# Altium PCB RBR-RAMON2.PcbDoc
Units mil, origin at the board's own origin, x right, y up, seen from the top; angles counter-clockwise.
Board outline 10025.24 x 9586.2 mil, 2 copper layers (Top Layer, Bottom Layer); 14 components, 43 nets, 163 pads, 44 vias.
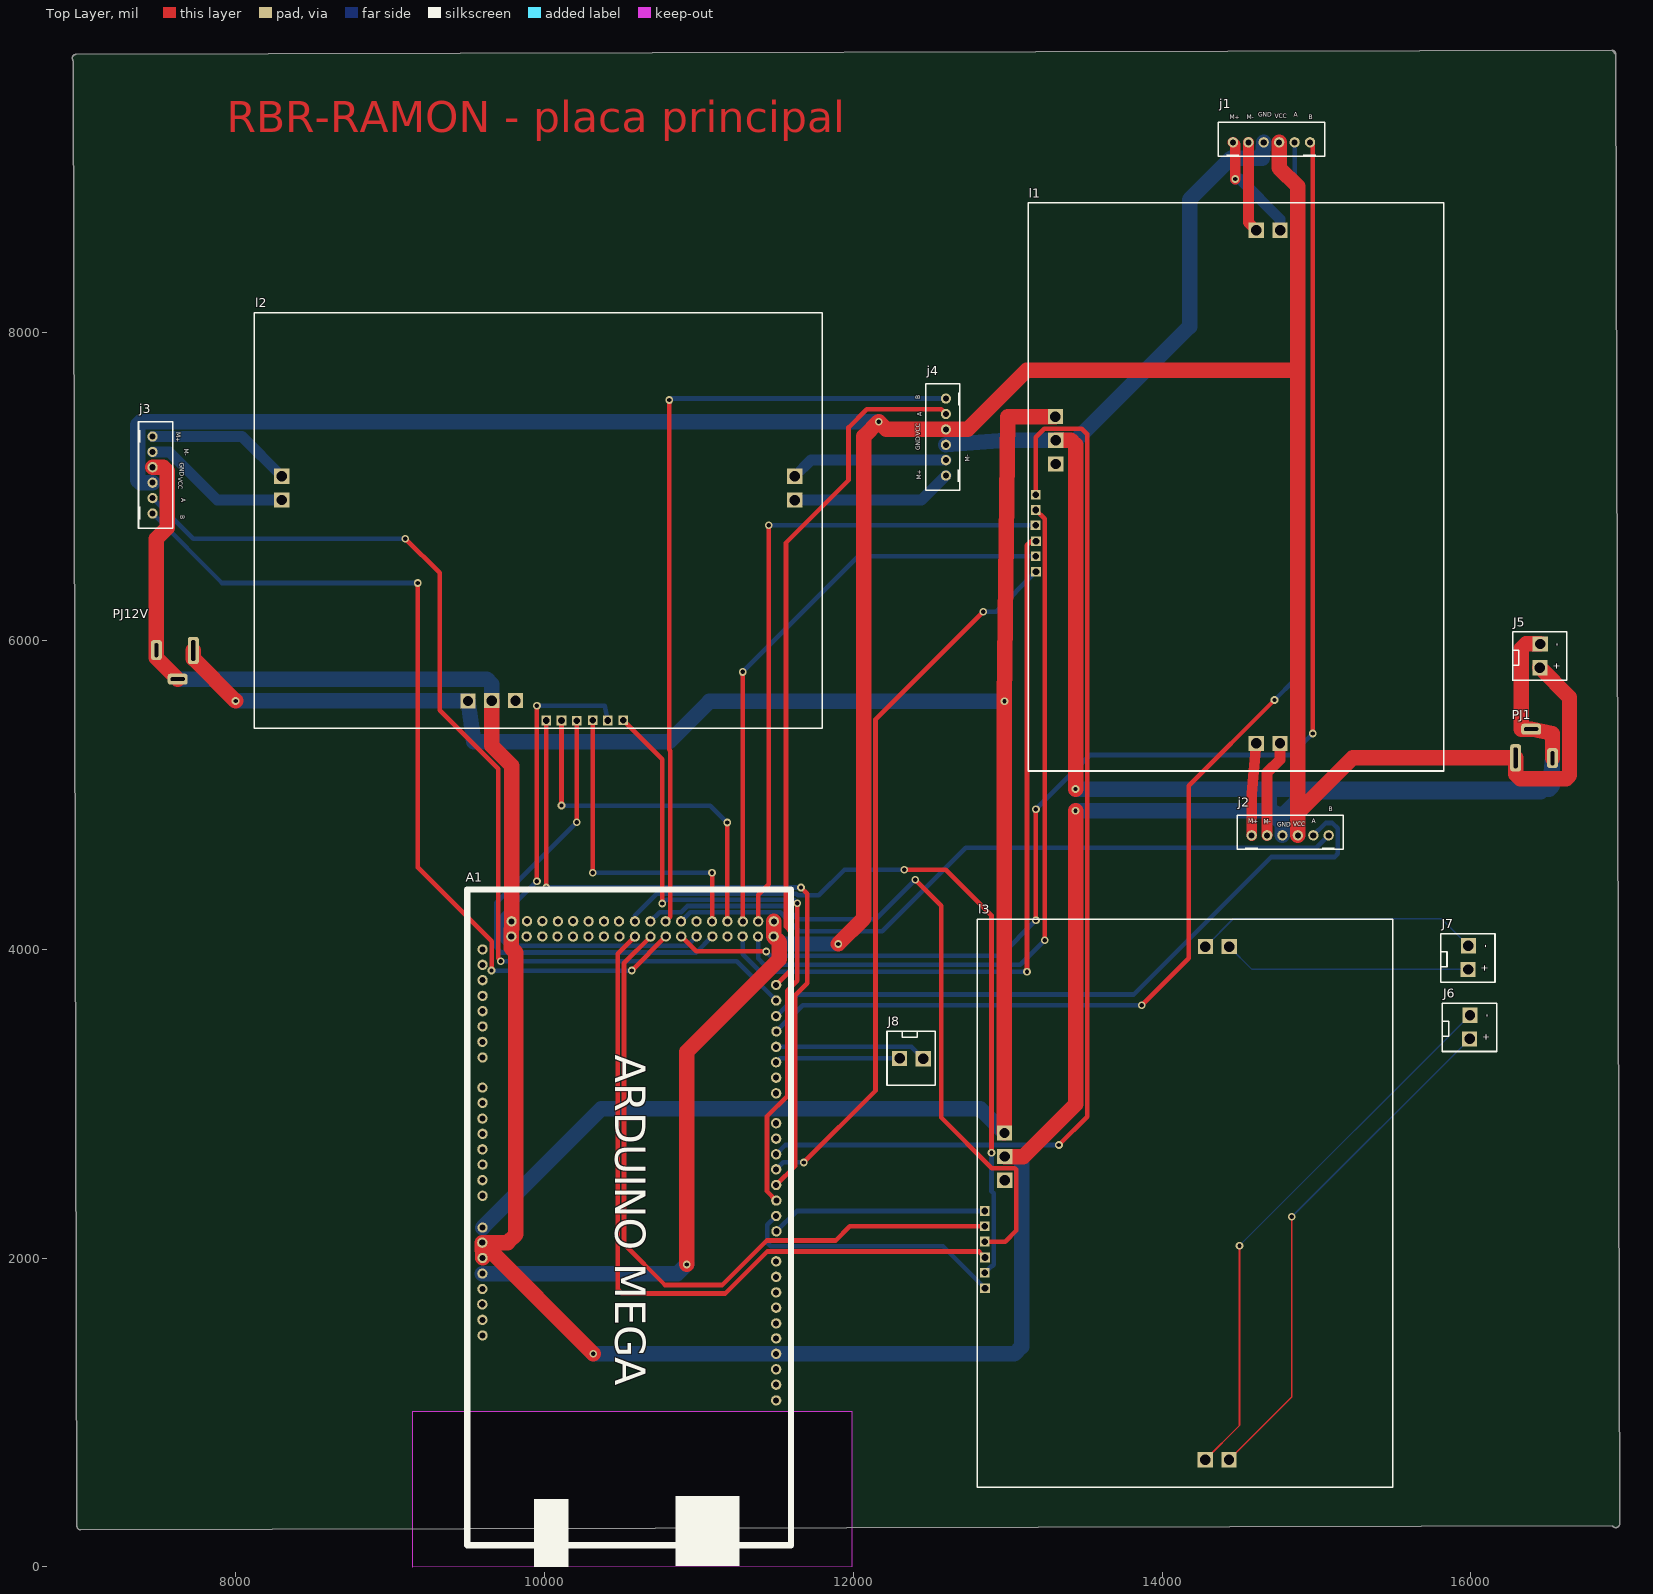
[diagram p0: Top Layer view]
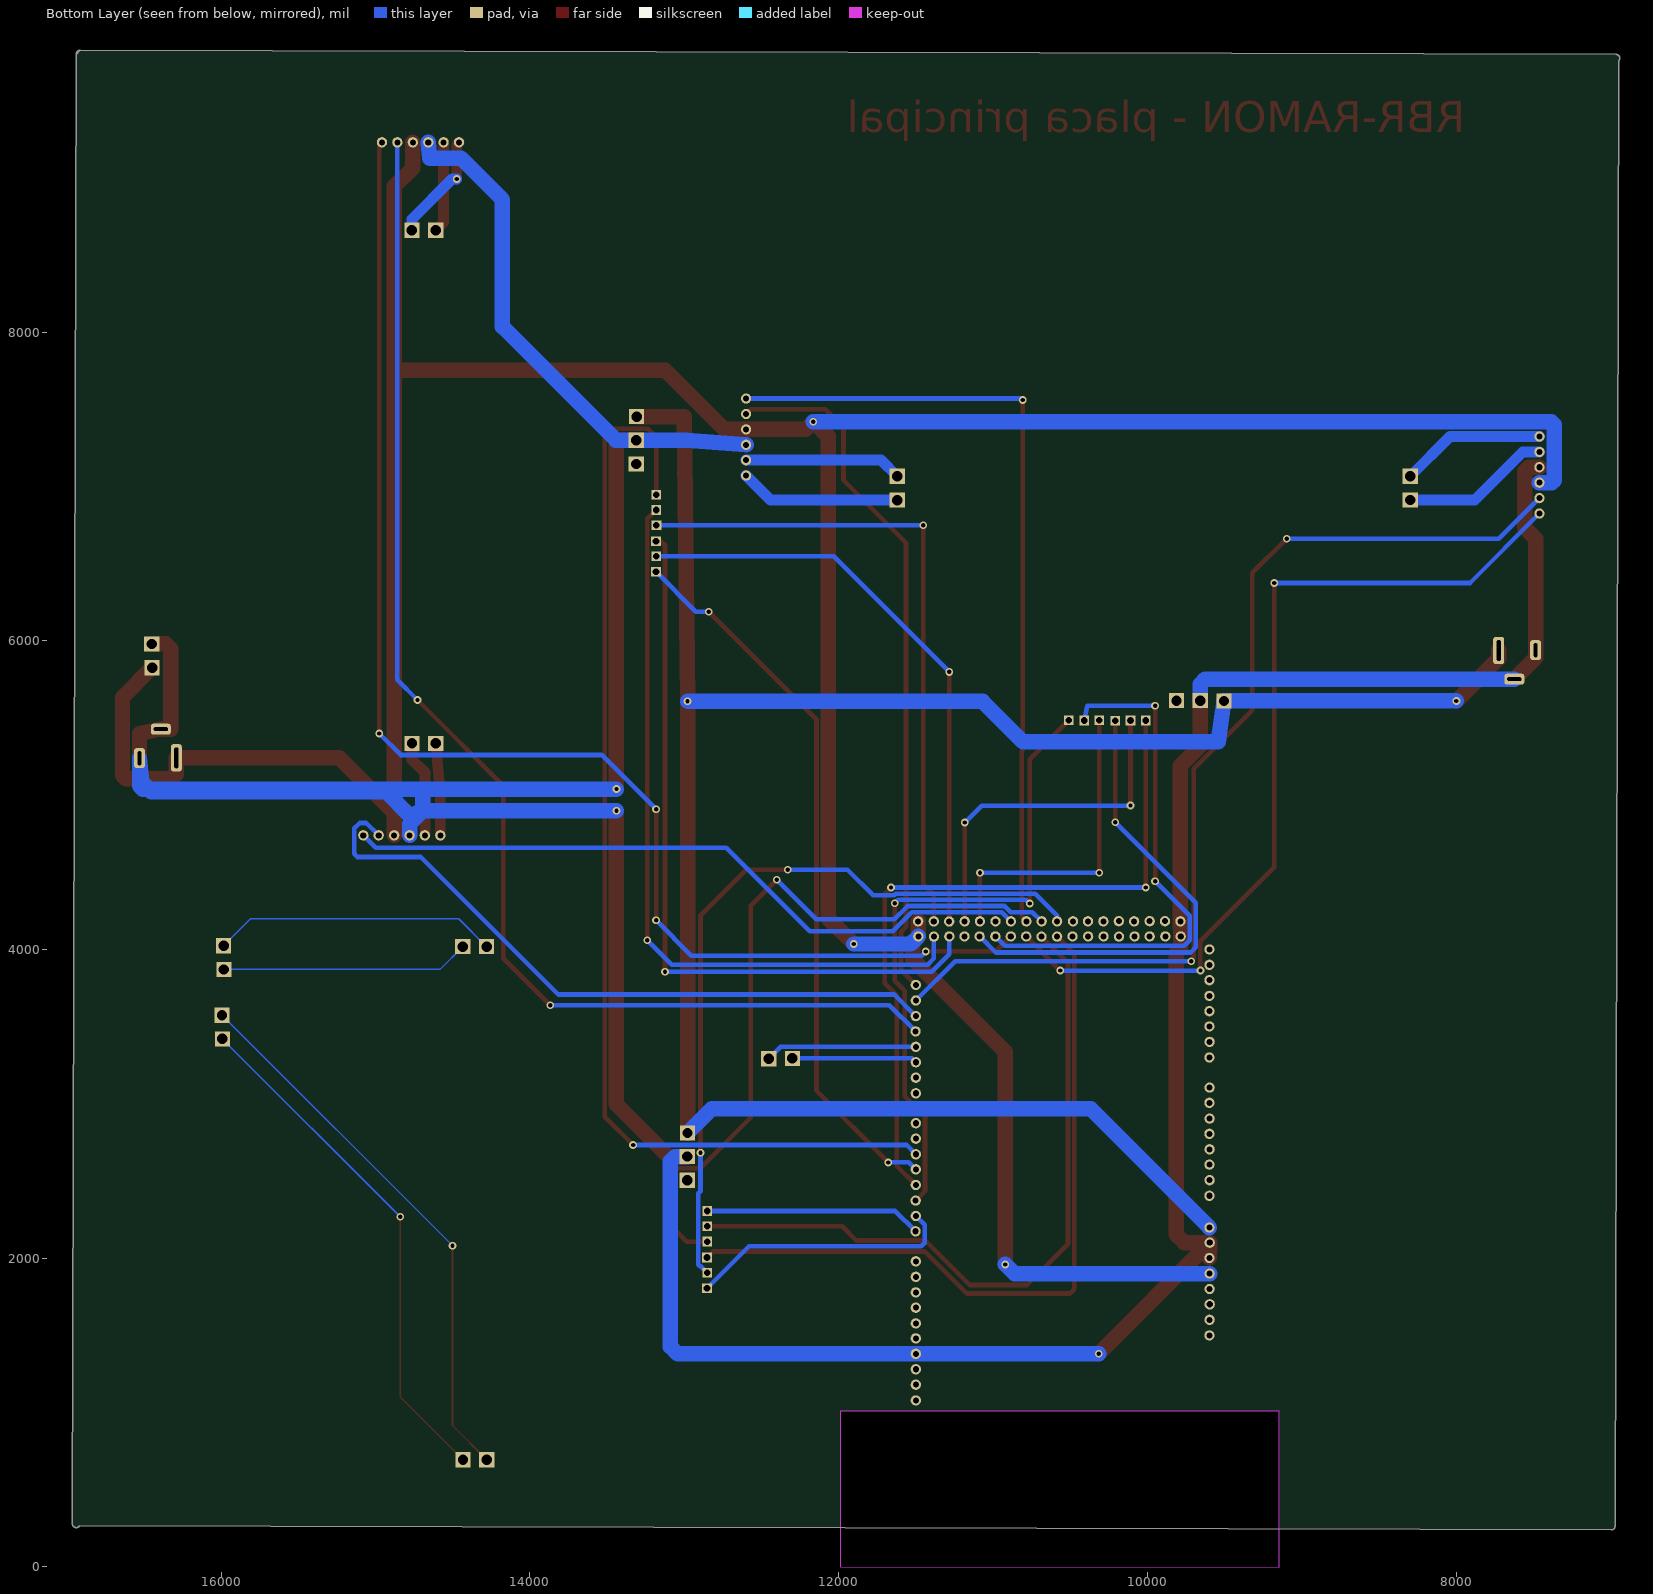
[diagram p1: Bottom Layer view, seen from below]
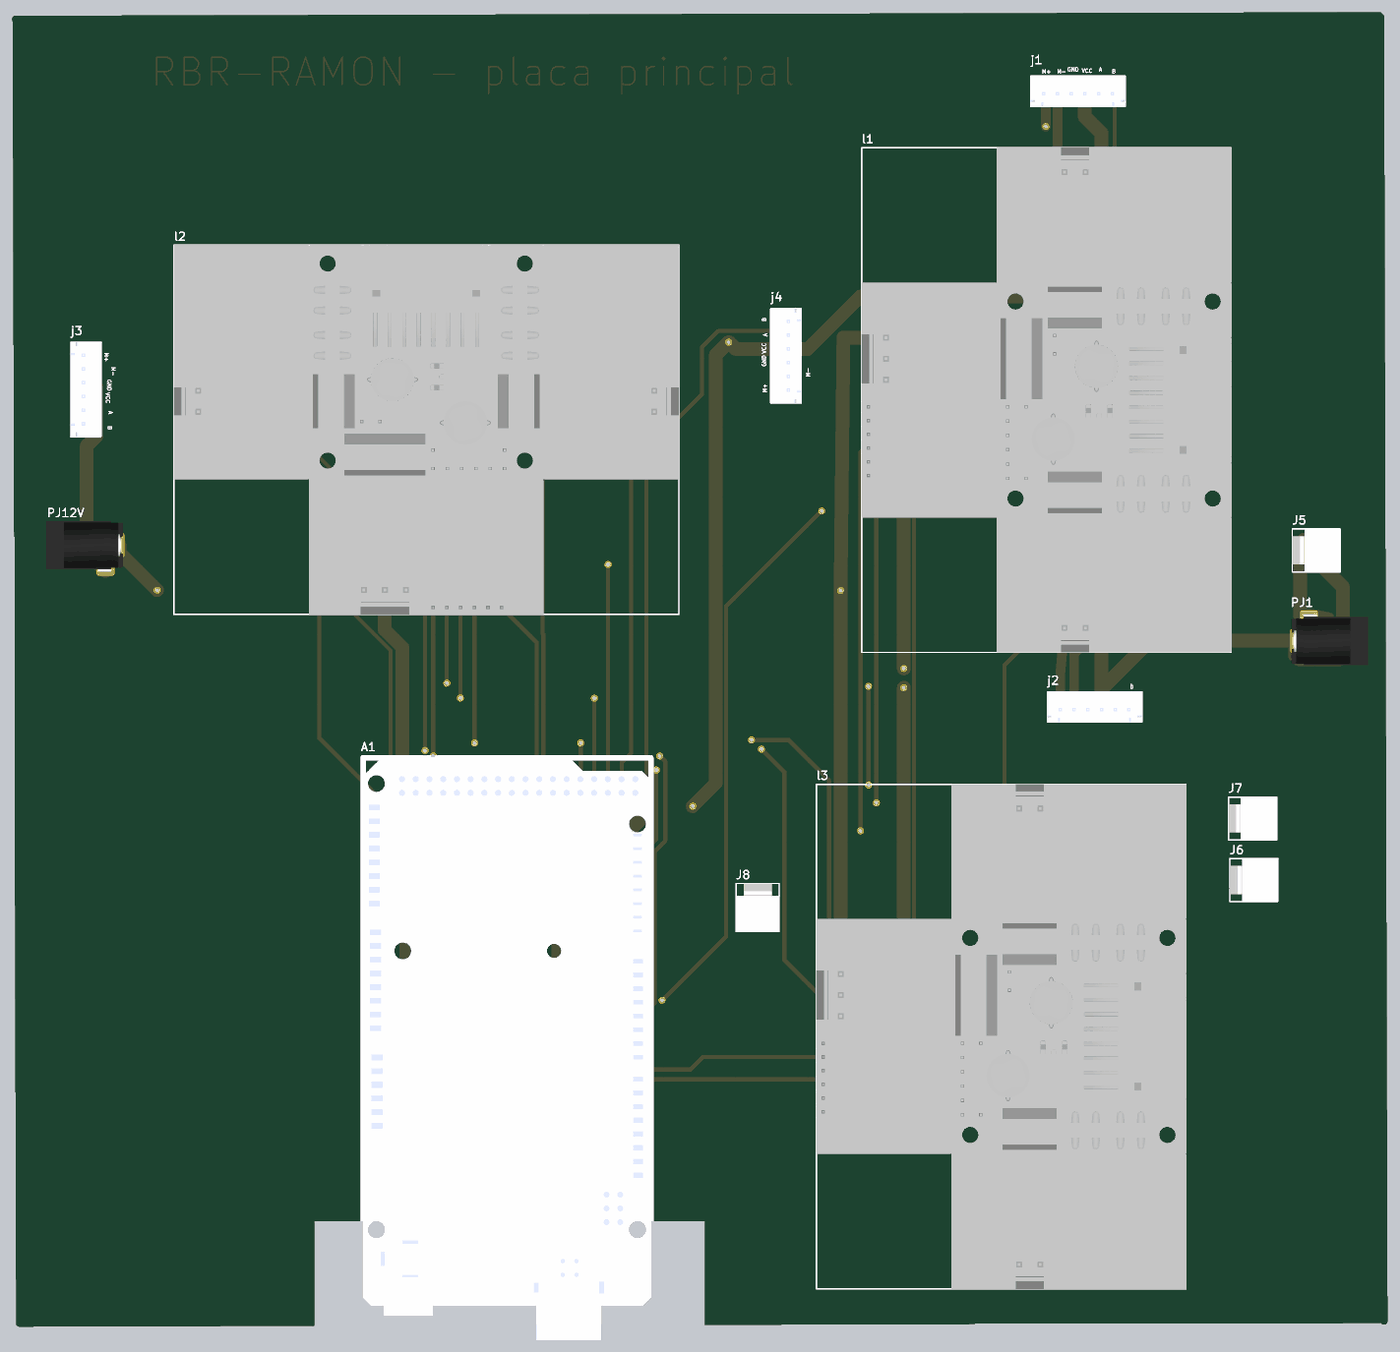
[diagram p2: 3D render of the assembled board from above, using the file's embedded part models]

## Layer stack, top to bottom
Top Solder: solder mask 0.4, Solder Resist, Dk 3.5
Top Layer: signal copper 1.4
Dielectric 1: dielectric 12.6, FR-4, Dk 4.8
Bottom Layer: signal copper 1.4
Bottom Solder: solder mask 0.4, Solder Resist, Dk 3.5

## Board outline
6969.99,269.93 6945.02,9759.94 cw(c6965,9775) 6964.93,9800.01 16915.09,9826.19 cw(c16915.18,9801.17) 16940.19,9801.24 16940.19,9801.21 ccw(c16915.18,9801.17) 16915.11,9826.19 16940.19,9801.21 16965.24,280.17 16965.24,280.11 cw(c16940.22,280.11) 16919.5,266.09 6995.07,239.99 cw(c6995,265)
cut-out: 9145,-2.61 9145,1010 11990,1010 11990,2.37

## Design rules (kind name [scope] priority, off if disabled: settings)
Clearance [All] p1: gap=10 ignorepadtopadclearanceinfootprint=FALSE
Height [All] p1: minheight=0 maxheight=30000 prefheight=500
HoleSize [All] p1: absolutevalues=TRUE maxlimit=250 minlimit=1 maxpercent=80.000 minpercent=20.000
MinimumSolderMaskSliver [All] p1: minsoldermaskwidth=4
PolygonConnect [All] p1: connectstyle=Relief reliefconductorwidth=10 reliefentries=4 polygonreliefangle="90 Angle" airgapwidth=10
RoutingVias [All] p1: holewidth=28 width=50 viastyle="Through Hole" minholewidth=28 minwidth=50 maxholewidth=28 maxwidth=50
SolderMaskExpansion [All] p1: expansion=0 istentingtop=FALSE
SupplyNets "Schematic Supply Nets_2" [InNet('+12')] p1: voltage=0.000
SupplyNets "Schematic Supply Nets_1" [InNet('+5')] p2: voltage=0.000
SupplyNets "Schematic Supply Nets" [InNet('GND')] p3: voltage=0.000
Width SEÑAL [InNet('NetA1_2')] p1: maxlimit=30 minlimit=30 preferedwidth=30
Width SEÑAL_1 [InNet('NetA1_3')] p2: maxlimit=30 minlimit=30 preferedwidth=30
Width SEÑAL_2 [InNet('NetA1_4')] p3: maxlimit=30 minlimit=30 preferedwidth=30
Width SEÑAL_3 [InNet('NetA1_5')] p4: maxlimit=30 minlimit=30 preferedwidth=30
Width SEÑAL_4 [InNet('NetA1_6')] p5: maxlimit=30 minlimit=30 preferedwidth=30
Width SEÑAL_5 [InNet('NetA1_7')] p6: maxlimit=30 minlimit=30 preferedwidth=30
Width SEÑAL_6 [InNet('NetA1_16-TX2')] p7: maxlimit=30 minlimit=30 preferedwidth=30
Width SEÑAL_7 [InNet('NetA1_17-RX2')] p8: maxlimit=30 minlimit=30 preferedwidth=30
Width SEÑAL_8 [InNet('NetA1_18-TX1')] p9: maxlimit=30 minlimit=30 preferedwidth=30
Width SEÑAL_9 [InNet('NetA1_19-RX1')] p10: maxlimit=30 minlimit=30 preferedwidth=30
Width SEÑAL_10 [InNet('NetA1_20-SDA')] p11: maxlimit=30 minlimit=30 preferedwidth=30
Width SEÑAL_11 [InNet('NetA1_21-SCL')] p12: maxlimit=30 minlimit=30 preferedwidth=30
Width SEÑAL_12 [InNet('NetA1_22')] p13: maxlimit=30 minlimit=30 preferedwidth=30
Width SEÑAL_13 [InNet('NetA1_23')] p14: maxlimit=30 minlimit=30 preferedwidth=30
Width SEÑAL_14 [InNet('NetA1_24')] p15: maxlimit=30 minlimit=30 preferedwidth=30
Width SEÑAL_20 [InNet('NetA1_25')] p16: maxlimit=30 minlimit=30 preferedwidth=30
Width SEÑAL_19 [InNet('NetA1_27')] p17: maxlimit=30 minlimit=30 preferedwidth=30
Width SEÑAL_18 [InNet('NetA1_28')] p18: maxlimit=30 minlimit=30 preferedwidth=30
Width SEÑAL_17 [InNet('NetA1_29')] p19: maxlimit=30 minlimit=30 preferedwidth=30
Width SEÑAL_16 [InNet('NetA1_30')] p20: maxlimit=30 minlimit=30 preferedwidth=30
Width SEÑAL_15 [InNet('NetA1_32')] p21: maxlimit=30 minlimit=30 preferedwidth=30
Width SEÑAL_21 [InNet('NetA1_33')] p22: maxlimit=30 minlimit=30 preferedwidth=30
Width SEÑAL_22 [InNet('NetA1_34')] p23: maxlimit=30 minlimit=30 preferedwidth=30
Width SEÑAL_23 [InNet('NetA1_35')] p24: maxlimit=30 minlimit=30 preferedwidth=30
Width SEÑAL_24 [InNet('NetA1_36')] p25: maxlimit=30 minlimit=30 preferedwidth=30
Width SEÑAL_25 [InNet('NetA1_37')] p26: maxlimit=30 minlimit=30 preferedwidth=30
Width SEÑAL_26 [InNet('NetA1_38')] p27: maxlimit=30 minlimit=30 preferedwidth=30
Width SEÑAL_27 [InNet('NetA1_39')] p28: maxlimit=30 minlimit=30 preferedwidth=30
Width M4- [InNet('Netj4_M4-')] p29: maxlimit=70 minlimit=60 preferedwidth=70
Width M4+ [InNet('Netj4_M4+')] p30: maxlimit=70 minlimit=60 preferedwidth=70
Width M3- [InNet('Netj3_M3-')] p31: maxlimit=70 minlimit=60 preferedwidth=70
Width M3+ [InNet('Netj3_M3+')] p32: maxlimit=70 minlimit=60 preferedwidth=70
Width M2- [InNet('Netj2_M2-')] p33: maxlimit=70 minlimit=60 preferedwidth=70
Width M2+ [InNet('Netj2_M2+')] p34: maxlimit=70 minlimit=60 preferedwidth=70
Width M1- [InNet('Netj1_M1-')] p35: maxlimit=70 minlimit=60 preferedwidth=70
Width M1+ [InNet('Netj1_M1+')] p36: maxlimit=70 minlimit=60 preferedwidth=70
Width GND [InNet('GND')] p37: maxlimit=100 minlimit=60 preferedwidth=100
Width "POWER 12V" [InNet('+12')] p38: maxlimit=100 minlimit=60 preferedwidth=100
Width "POWER 5V" [InNet('+5')] p39: maxlimit=100 minlimit=60 preferedwidth=100
27 further rules are at their usual default settings.

## Components (designator, comment, footprint, x,y, rotation, side; value= is the part's Value field where it differs from the comment)
A1 "Arduino Mega" "Arduino Mega" 9500,4167 r270 top
j1 "j1" "CONECTOR JST M1" 14671,9324 r0 top
j2 "j2" "CONECTOR JST M2" 14792,4834.02 r0 top
j3 "j3" "CONECTOR JST M3" 7554.02,7113 r270 top
j4 "j4" "CONECTOR JST M4" 12505.98,7282 r90 top
J5 "Connector_5V" Conector_5V 16408.66,5918.98 r90 top
J6 "Connector_12V" Conector_12V 15953.66,3513.98 r90 top
J7 "Connector_12V" Conector_12V 15943.66,3963.98 r90 top
J8 "Connector_lora_arduino" Conector_lora_arduino 12392.52,3334.37 r0 top
l1 "l298n" L298N_Conectores 14135,7160 r270 top
l2 "l298n" L298N_Conectores 9797,6437 r0 top
l3 "l298n" L298N_Conectores 13805,2519 r270 top
PJ1 "DC Power Jack 5V" "DC Power Jack5V" 16557,5423 r180 top
PJ12V "DC Power Jack 12V" "DC Power Jack12V" 7458,5757 r0 top

## Footprints (in the part's own frame and the unit in brackets; to place one, negate y for a bottom-side part, rotate by r counter-clockwise, add the part's x,y. Pads: shape width x height; smd on the part's side, far side on the other; paste and mask are expansions set on the pad)
"Arduino Mega" [mm]
  round 1.7 hole 1: 0-TX0(32.817,50.8) 1-TX0(35.357,50.8) 2(37.925,50.8) 3(40.411,50.8) 3.3V(60.096,2.464) 4(42.977,50.8) 5(45.542,50.825) 5V(-0.406,50.419) 5V(2.083,50.394) 5V(57.556,2.464) 6(48.082,50.8) 7(50.597,50.851) 8(55.55,50.8) 9(58.09,50.8) 10(60.655,50.8) 11(63.17,50.8) 12(65.761,50.8) 13(68.224,50.8) 14-TX3(27.889,50.8) 15-RX3(25.324,50.8) 16-TX2(22.784,50.8) 17-RX2(20.244,50.8) 18-TX1(17.704,50.851) 19-RX1(15.19,50.8) 20-SDA(12.624,50.8) 21-SCL(10.058,50.8) 22(2.108,47.828) 23(-0.406,47.854) 24(2.083,45.288) 25(-0.381,45.314) 26(2.083,42.799) 27(-0.406,42.774) 28(2.083,40.31) 29(-0.406,40.259) 30(2.083,37.719) 31(-0.406,37.694) 32(2.083,35.179) 33(-0.406,35.154) 34(2.083,32.639) 35(-0.406,32.614) 36(2.108,30.124) 37(-0.406,30.099) 38(2.108,27.559) 39(-0.406,27.559) 40(2.083,25.019) 41(-0.406,24.938) 42(2.083,22.454) 43(-0.406,22.479) 44(2.083,19.914) 45(-0.406,19.939) 46(2.108,17.374) 47(-0.432,17.399) 48(2.083,14.808) 49(-0.406,14.884) 50(2.083,12.319) 51(-0.432,12.319) 52(2.083,9.754) 53(-0.432,9.804) A0(44.755,2.489) A1(42.189,2.464) A2(39.624,2.489) A3(37.109,2.464) A4(34.569,2.489) A5(32.055,2.464) A6(29.464,2.489) A7(26.949,2.464) A8(21.996,2.489) A9(19.431,2.464) A10(16.891,2.489) A11(14.376,2.489) A12(11.862,2.489) A13(9.271,2.489) A14(6.756,2.489) A15(4.216,2.489) AREF(73.304,50.8) GND(-0.406,7.264) GND(2.083,7.214) GND(52.476,2.438) GND(54.991,2.489) GND(70.764,50.8) IOREF(65.176,2.464) N/A(67.742,2.489) RESET(62.611,2.438) SCL(78.435,50.8) SDA(75.844,50.8) VIN(49.987,2.489)
  silkscreen extent -5.66,-0.03 105.84,53.24, body extent -5.72,-0.1 102.24,53.31, height 10.71
"CONECTOR JST M1" [mm]
  round 1.7 hole 1: A1(4.775,-2.388) B1(7.315,-2.388) GND1(-0.305,-2.388) M1+(-5.359,-2.388) M1-(-2.819,-2.388) VCC1(2.235,-2.388)
  silkscreen extent -7.77,-4.7 9.73,0.91, body extent -7.82,-4.73 9.72,1.02, height 2.95
"CONECTOR JST M2" [mm]
  round 1.7 hole 1: A2(4.775,-2.388) B2(7.315,-2.388) GND2(-0.305,-2.388) M2+(-5.359,-2.388) M2-(-2.819,-2.388) VCC2(2.235,-2.388)
  silkscreen extent -7.77,-4.7 9.73,0.91, body extent -7.82,-4.73 9.72,1.02, height 2.95
"CONECTOR JST M3" [mm]
  round 1.7 hole 1: A3(4.775,-2.388) B3(7.315,-2.388) GND3(-0.305,-2.388) M3+(-5.359,-2.388) M3-(-2.819,-2.388) VCC3(2.235,-2.388)
  silkscreen extent -7.77,-4.7 9.73,0.91, body extent -7.82,-4.73 9.72,1.02, height 2.95
"CONECTOR JST M4" [mm]
  round 1.7 hole 1: A4(4.775,-2.388) B4(7.315,-2.388) GND4(-0.305,-2.388) M4+(-5.359,-2.388) M4-(-2.819,-2.388) VCC4(2.235,-2.388)
  silkscreen extent -7.77,-4.7 9.73,0.91, body extent -7.82,-4.73 9.72,1.02, height 2.95
Conector_5V [mm]
  rect 2.5x2.5 hole 1.7: 5V(-2.35,-1) GND(1.55,-1.05)
  silkscreen extent -4.42,-5.42 3.53,3.5, body extent -4.42,-5.48 3.58,3.5, height 11.7
Conector_12V [mm]
  rect 2.5x2.5 hole 1.7: 12V(-2.35,-1) GND(1.55,-1.05)
  silkscreen extent -4.42,-5.42 3.53,3.5, body extent -4.42,-5.48 3.58,3.5, height 11.7
Conector_lora_arduino [mm]
  rect 2.5x2.5 hole 1.7: 16(-2.35,-1) 17(1.55,-1.05)
  silkscreen extent -4.42,-5.42 3.53,3.5, body extent -4.42,-5.48 3.58,3.5, height 11.7
"DC Power Jack5V" [mm]
  rrect50% 1.8x3.3 hole 0.6 slot 2.3 at 90 deg: GND(0.686,4.648)
  rrect50% 3.3x1.8 hole 0.6 slot 2.3 at 0 deg: GND(4.191,-0.127)
  rrect50% 1.8x4.5 hole 0.7 slot 3.4 at 90 deg: VCC(6.756,4.597)
  body extent -6.79,-0.33 7.41,9.12, height 11
"DC Power Jack12V" [mm]
  rrect50% 1.8x3.3 hole 0.6 slot 2.3 at 90 deg: GND(0.686,4.648)
  rrect50% 3.3x1.8 hole 0.6 slot 2.3 at 0 deg: GND(4.191,-0.127)
  rrect50% 1.8x4.5 hole 0.7 slot 3.4 at 90 deg: VCC(6.756,4.597)
  body extent -6.79,-0.33 7.41,9.12, height 11
L298N_Conectores [mm]
  rect 2.5x2.5 hole 1.7: 5V(0.356,-20.93) 12V(-7.442,-20.98) GND(-3.556,-20.93) OUT1(-38.1,16.002) OUT2(-38.1,12.09) OUT3(46.33,12.065) OUT4(46.33,15.977)
  rect 1.6x1.6 hole 1.1: ENA(5.41,-24.206) ENB(18.11,-24.181) IN1(7.925,-24.206) IN2(10.439,-24.232) IN3(13.056,-24.181) IN4(15.545,-24.206)
  silkscreen extent -42.6,-25.45 50.87,42.92, body extent -42.63,-25.48 50.87,43.02, height 26.7

## Part data
j1: library part "CONECTOR JST M1"
j2: library part "CONECTOR JST M2"
j3: library part "CONECTOR JST M3"
j4: library part "CONECTOR JST M4"

## Via types
v1: diameter 50, hole 28, Top Layer to Bottom Layer, 44 vias

## Nets (pads, with @x,y where several pads share a name; then routed paths per layer and width w, separated by ;. In a path a pad name is that pad's centre, name@x,y a point inside that pad or via, vN(x,y) a via of type N, cw(c..) or ccw(c..) an arc to the next point about the centre after c; other vN are vias at no path point)
+5: A1.5V j1.VCC1 j2.VCC2 j3.VCC3 j4.VCC4 J5.5V PJ1.VCC | length 23281.8
  Top Layer w100: v1(10920,1960) 10920,3337.44 11521,3938.44 11521,4048 11484,4085 11484,4133 11485,4134 A1.5V@11485,4183 ; v1(11902,4036) 12069,4203 12069,7325 v1(12164,7420) 12214,7370 j4.VCC4 12740,7370 13122,7752 14880,7752 ; j1.VCC1 14759,9065 14880,8944 14880,7752 ; j2.VCC2 14880,4887 ; J5.5V 16640,5634.49 16640,5128 16620,5108 16320,5108 16291,5137 PJ1.VCC 15235,5242 14880,4887 ; 14880,4887 14880,7752
  Bottom Layer w100: j3.VCC3 7379,7025 7364,7040 7364,7400 7384,7420 v1(12164,7420) ; A1.5V@9597,1901 10861,1901 v1(10920,1960) ; A1.5V@11484,4085 11533,4036 v1(11902,4036)
+12: A1.VIN l1.12V l2.12V l3.12V PJ12V.VCC | length 14476.5
  Top Layer w100: PJ12V.VCC 7724,5885 v1(7998,5611) ; l3.12V v1(12979,5608) 13000,7453 l1.12V
  Bottom Layer w100: v1(7998,5611) l2.12V 9540,5346 10806,5346 11068,5608 v1(12979,5608) ; A1.VIN 10368,2969 12822,2969 l3.12V
GND: A1.GND j1.GND1 j2.GND2 j3.GND3 j4.GND4 J5.GND l1.GND l2.GND l3.GND PJ1.GND PJ12V.GND | length 28985.7
  Top Layer w100: j3.GND3 7529,7125 7554,7100 7554,6732 7485,6663 7485,5940 7485,5890 PJ12V.GND@7623,5752 ; A1.GND@9598,2002 9598,2050 9596,2052 A1.GND@9596,2101 ; l2.GND 9657,5321 9786,5192 9786,4183 9786,4135 9784,4133 9784,4085 9784,4010 9814,3980 9814,2155 9760,2101 A1.GND@9596,2101 ; v1(10316,1381) A1.GND@9596,2101 ; l3.GND 13102,2659 13440,2997 v1(13440,4900) ; l1.GND 13410,7300 13440,7270 v1(13440,5040) ; J5.GND 16358,5980 16327.62,5949.62 16327.62,5428 16392,5428 16530,5400 PJ1.GND@16530,5240
  Bottom Layer w100: PJ12V.GND@7623,5752 9625,5752 9657,5720 l2.GND ; v1(10316,1381) 11500,1381 13044,1381 13091,1428 13091,2628 13060,2659 l3.GND ; j4.GND4 12986,7300 l1.GND 13443,7300 14179,8036 14179,8859 14447,9127 14649,9127 j1.GND1 ; v1(13440,4900) 14694,4900 ; v1(13440,5040) 14694,5040 ; j2.GND2 14780,4814 14694,4900 ; 14694,4900 14694,5040 ; 14694,4900 14780,4870 14933.4,5023.4 16453.4,5023.4 16470,5040 ; 14694,5040 16470,5040 ; 16470,5040 16510,5040 ; 16470,5040 16514.44,5084.44 ; 16510,5040 16514.44,5084.44 ; 16510,5040 16530,5060 16530,5100 ; 16514.44,5084.44 16530,5240 16530,5100 ; 16514.44,5084.44 16530,5100
NetA1_2: A1.2 l1.ENA | length 7282
  Top Layer w30: l1.ENA 13182,7320 13237,7375 13480,7375 13515,7340 13515,2917 v1(13332,2734)
  Bottom Layer w30: A1.2 11560.1,2734 v1(13332,2734)
NetA1_3: A1.3 l1.ENB | length 4694.7
  Top Layer w30: v1(11678,2621) 12144,3087 12144,5491 v1(12842,6189)
  Bottom Layer w30: A1.3 11545,2621 v1(11678,2621) ; v1(12842,6189) 12925,6189 l1.ENB
NetA1_4: A1.4 l2.ENA | length 4759.8
  Top Layer w30: v1(10010,4402) l2.ENA ; A1.4 11623,2598 11623,3704.5 11701,3782.5 11701,4362 v1(11661,4402)
  Bottom Layer w30: v1(10010,4402) v1(11661,4402)
NetA1_5: A1.5 l2.ENB | length 4215.5
  Top Layer w30: l2.ENB 10763,5232 v1(10763,4298) ; A1.5 11441,2434 11441,2920 11571,3050 11571,3732.5 11636,3797.5 v1(11636,4300)
  Bottom Layer w30: v1(10763,4298) 10787,4322 11614,4322 v1(11636,4300)
NetA1_6: A1.6 l3.ENB | length 1729.4
  Bottom Layer w30: A1.6 11443,2217 11443,2100 11465,2078 12581,2078 l3.ENB
NetA1_7: A1.7 l3.ENA | length 1404.3
  Bottom Layer w30: A1.7 11633,2306 l3.ENA
NetA1_16-TX2: A1.16-TX2 J8.16 | length 810.4
  Bottom Layer w30: A1.16-TX2 11525,3295 J8.16
NetA1_17-RX2: A1.17-RX2 J8.17 | length 985.4
  Bottom Layer w30: A1.17-RX2 12376.58,3370 J8.17
NetA1_18-TX1: A1.18-TX1 j1.A1 | length 8437.5
  Top Layer w30: v1(13869,3640) 14173,3944 14173,5061 v1(14729,5617)
  Bottom Layer w30: A1.18-TX1 11672,3640 v1(13869,3640) ; v1(14729,5617) 14859,5747 j1.A1
NetA1_19-RX1: A1.19-RX1 j2.A2 | length 4446
  Bottom Layer w30: A1.19-RX1 11640.03,3709 13816,3709 14707,4600 15119,4600 15139,4620 15139,4785 15104,4820 15060,4820 j2.A2
NetA1_20-SDA: A1.20-SDA j3.A3 | length 6629.3
  Top Layer w30: v1(9098,6662) 9320,6440 9320,5551 9698.5,5172.5 9698.5,3942.96 v1(9716.46,3925)
  Bottom Layer w30: j3.A3 7723,6662 v1(9098,6662) ; v1(9716.46,3925) 11245,3925 A1.20-SDA
NetA1_21-SCL: A1.21-SCL j4.A4 | length 4524.9
  Top Layer w30: A1.21-SCL 11596,3867 11596,4116 11564,4148 11564,6635 11969,7040 11969,7382 12088,7501 12569,7501 j4.A4
NetA1_22: A1.22 l1.IN1 | length 4893.7
  Top Layer w30: l1.IN1 13240,6790 v1(13240,4060)
  Bottom Layer w30: A1.22 11383,3942.29 11424.29,3901 13081,3901 v1(13240,4060)
NetA1_23: A1.23 l1.IN2 | length 4322.6
  Top Layer w30: A1.23 11384,4355 11453,4424 v1(11453,6749)
  Bottom Layer w30: v1(11453,6749) l1.IN2
NetA1_24: A1.24 l1.IN3 | length 4837.2
  Top Layer w30: v1(13125,3856.22) 13125,6620 13151,6646 l1.IN3
  Bottom Layer w30: A1.24 11283,3969.06 11395.85,3856.22 v1(13125,3856.22)
NetA1_25: A1.25 l1.IN4 | length 3825.2
  Top Layer w30: A1.25 v1(11284,5799)
  Bottom Layer w30: v1(11284,5799) 12033,6548 l1.IN4
NetA1_27: A1.27 l2.IN1 | length 2311.6
  Top Layer w30: v1(10109,4933) l2.IN1 ; A1.27 v1(11184,4823)
  Bottom Layer w30: v1(10109,4933) 11074,4933 v1(11184,4823)
NetA1_28: A1.28 l2.IN2 | length 3142.8
  Top Layer w30: v1(10208,4825) l2.IN2
  Bottom Layer w30: v1(10208,4825) 9685.53,4302.53 9685.53,4015.47 9720,3981 10983,3981 A1.28
NetA1_29: A1.29 l2.IN3 | length 2076
  Top Layer w30: v1(10311,4497) l2.IN3 ; A1.29 v1(11085,4497)
  Bottom Layer w30: v1(10311,4497) v1(11085,4497)
NetA1_30: A1.30 l2.IN4 | length 3448.9
  Top Layer w30: v1(9950,4442.47) v1(9950,5580)
  Bottom Layer w30: v1(9950,4442.47) 9725.53,4218 9725.53,4060 9760.53,4025 10925,4025 A1.30 ; v1(9950,5580) 10389,5580 l2.IN4
NetA1_32: A1.32 j1.B1 | length 8998.6
  Top Layer w30: A1.32 10981.99,3988 v1(11436,3988) ; v1(13183,4190) v1(13183,4910) ; j1.B1 14977,9212 v1(14977,5400)
  Bottom Layer w30: v1(11436,3988) 11463,3961 12954,3961 v1(13183,4190) ; v1(13183,4910) 13534,5261 14838,5261 v1(14977,5400)
NetA1_33: A1.33 j2.B2 | length 4529.4
  Bottom Layer w30: A1.33 10943,4242 11527,4242 11651,4118 12187.85,4118 12728.85,4659 14998.98,4659 j2.B2
NetA1_34: A1.34 j3.B3 | length 5834.2
  Top Layer w30: v1(9179,6375) 9179,4532 9656.47,4054.53 v1(9656.47,3864) ; v1(10564.01,3864) A1.34
  Bottom Layer w30: j3.B3 7910.02,6375 v1(9179,6375) ; v1(9656.47,3864) v1(10564.01,3864)
NetA1_35: A1.35 j4.B4 | length 5187.2
  Top Layer w30: A1.35 10813,4212 10813,5289 10808,5294 v1(10808,7560)
  Bottom Layer w30: v1(10808,7560) 10818,7570 j4.B4
NetA1_36: A1.36 l3.IN1 | length 4667.8
  Top Layer w30: A1.36 10514,3912 10514,2093 10780,1827 11152,1827 11440,2115 11886,2115 11978,2207 l3.IN1
NetA1_37: A1.37 l3.IN2 | length 4764.8
  Top Layer w30: v1(12402,4452) 12569,4285 12569,2912 12897,2584 13047,2584 13056,2575 13056,2180 12984,2108 l3.IN2
  Bottom Layer w30: A1.37 10745,4243 10885,4243 10924,4282 11554,4282 11639.47,4196.53 12146.53,4196.53 v1(12402,4452)
NetA1_38: A1.38 l3.IN3 | length 4850.6
  Top Layer w30: A1.38 10474,3973 10474,1798 10500,1772 11169.53,1772 11441.53,2044 12814,2044 l3.IN3
NetA1_39: A1.39 l3.IN4 | length 4951.3
  Top Layer w30: v1(12330,4518) 12600,4518 12895,4223 v1(12895,2684)
  Bottom Layer w30: A1.39 10585,4220 10727,4362 11631,4362 11641,4352 11777,4352 11943,4518 v1(12330,4518) ; l3.IN4 12893,1948 12900,1948 12910,1958 12910,2420 12895,2435 v1(12895,2684)
Netj1_M1+: j1.M1+ l1.OUT1 | length 713.9
  Top Layer w70: j1.M1+ 14475,9215 v1(14475,8992)
  Bottom Layer w70: v1(14475,8992) 14505,8992 14765,8732 l1.OUT1
Netj1_M1-: j1.M1- l1.OUT2 | length 591.1
  Top Layer w70: j1.M1- 14560,8711 l1.OUT2
Netj2_M2+: j2.M2+ l1.OUT3 | length 597.3
  Top Layer w70: j2.M2+ 14581,5009 l1.OUT3
Netj2_M2-: j2.M2- l1.OUT4 | length 630.4
  Top Layer w70: j2.M2- 14681,5147 14764,5230 l1.OUT4
Netj3_M3+: j3.M3+ l2.OUT1 | length 943.4
  Bottom Layer w70: j3.M3+ 8040,7324 l2.OUT1
Netj3_M3-: j3.M3- l2.OUT2 | length 965.8
  Bottom Layer w70: j3.M3- 7568,7224 7879,6913 l2.OUT2
Netj4_M4+: j4.M4+ l2.OUT3 | length 1044.8
  Bottom Layer w70: l2.OUT3 12440.98,6912 j4.M4+
Netj4_M4-: j4.M4- l2.OUT4 | length 1022.5
  Bottom Layer w70: l2.OUT4 11726,7171 j4.M4-
NetJ6_12V: J6.12V l3.OUT4 | length 3372.2
  Top Layer w10: l3.OUT4 14840,1101 v1(14840,2268.42)
  Bottom Layer w10: v1(14840,2268.42) J6.12V
NetJ6_GND: J6.GND l3.OUT3 | length 3590.4
  Top Layer w10: l3.OUT3 14502,917 v1(14502,2082)
  Bottom Layer w10: v1(14502,2082) J6.GND
NetJ7_12V: J7.12V l3.OUT1 | length 1609.1
  Bottom Layer w10: l3.OUT1 14582.54,3871.46 J7.12V
NetJ7_GND: J7.GND l3.OUT2 | length 1851.5
  Bottom Layer w10: l3.OUT2 14462,4200 15810,4200 J7.GND
pads on no net: A1.0-TX0 A1.1-TX0 A1.3.3V A1.8 A1.9 A1.10 A1.11 A1.12 A1.13 A1.14-TX3 A1.15-RX3 A1.26 A1.31 A1.40 A1.41 A1.42 A1.43 A1.44 A1.45 A1.46 A1.47 A1.48 A1.49 A1.50 A1.51 A1.52 A1.53 A1.A0 A1.A1 A1.A2 A1.A3 A1.A4 A1.A5 A1.A6 A1.A7 A1.A8 A1.A9 A1.A10 A1.A11 A1.A12 A1.A13 A1.A14 A1.A15 A1.AREF A1.IOREF A1.N/A A1.RESET A1.SCL A1.SDA l1.5V l2.5V l3.5V

## Other copper
Top Layer:
  text "RBR-RAMON - placa principal" at 7940,9296.65 h200

## Silkscreen, mask and mechanical layers (free items; w line width, h text height)
Mechanical 1:
  lines w50: 6965,9775 16915.18,9801.17 16940.22,280.11 ; 6970,9775 6995,270 ; 6995,265 16925.05,291.12

## Text inside footprints (layer, text, board x,y; h text height)
A1: Top Overlay "ARDUINO MEGA" at 10458,3317 h196.85 r270
j1: Top Overlay "B" at 14950,9380 h27.56; Top Overlay "A" at 14855,9395 h27.56; Top Overlay "VCC" at 14730,9385 h27.56; Top Overlay "GND" at 14625,9395 h27.56; Top Overlay "M-" at 14550,9380 h27.56; Top Overlay "M+" at 14440,9380 h27.56
j2: Top Overlay "B" at 15080,4895 h27.56; Top Overlay "A" at 14970,4820 h27.56; Top Overlay "VCC" at 14850,4800 h27.56; Top Overlay "GND" at 14745,4795 h27.56; Top Overlay "M-" at 14660,4815 h27.56; Top Overlay "M+" at 14560,4820 h27.56
j3: Top Overlay "M+" at 7615,7350 h27.56 r270; Top Overlay "M-" at 7665,7245 h27.56 r270; Top Overlay "GND" at 7635,7155 h27.56 r270; Top Overlay "VCC" at 7625,7060 h27.56 r270; Top Overlay "A" at 7645,6925 h27.56 r270; Top Overlay "B" at 7640,6815 h27.56 r270
j4: Top Overlay "B" at 12435,7565 h27.56 r90; Top Overlay "A" at 12445,7455 h27.56 r90; Top Overlay "VCC" at 12435,7330 h27.56 r90; Top Overlay "GND" at 12435,7235 h27.56 r90; Top Overlay "M-" at 12755,7160 h27.56 r90; Top Overlay "M+" at 12440,7045 h27.56 r90
J5: Top Overlay "-" at 16577.79,5965.39 h39.37 r90; Top Overlay "+" at 16575.5,5812.83 h39.37 r90
J6: Top Overlay "-" at 16122.79,3560.39 h39.37 r90; Top Overlay "+" at 16120.5,3407.83 h39.37 r90
J7: Top Overlay "-" at 16112.79,4010.39 h39.37 r90; Top Overlay "+" at 16110.5,3857.83 h39.37 r90